# Altium PCB Light_PCB.PcbDoc
Units mil, origin at the board's own origin, x right, y up, seen from the top; angles counter-clockwise.
Board outline 2090 x 1720 mil, 2 copper layers (Top Layer, Bottom Layer); 9 components, 6 nets, 62 pads, 0 vias.
Unrouted connection lines stored in the file: 6.
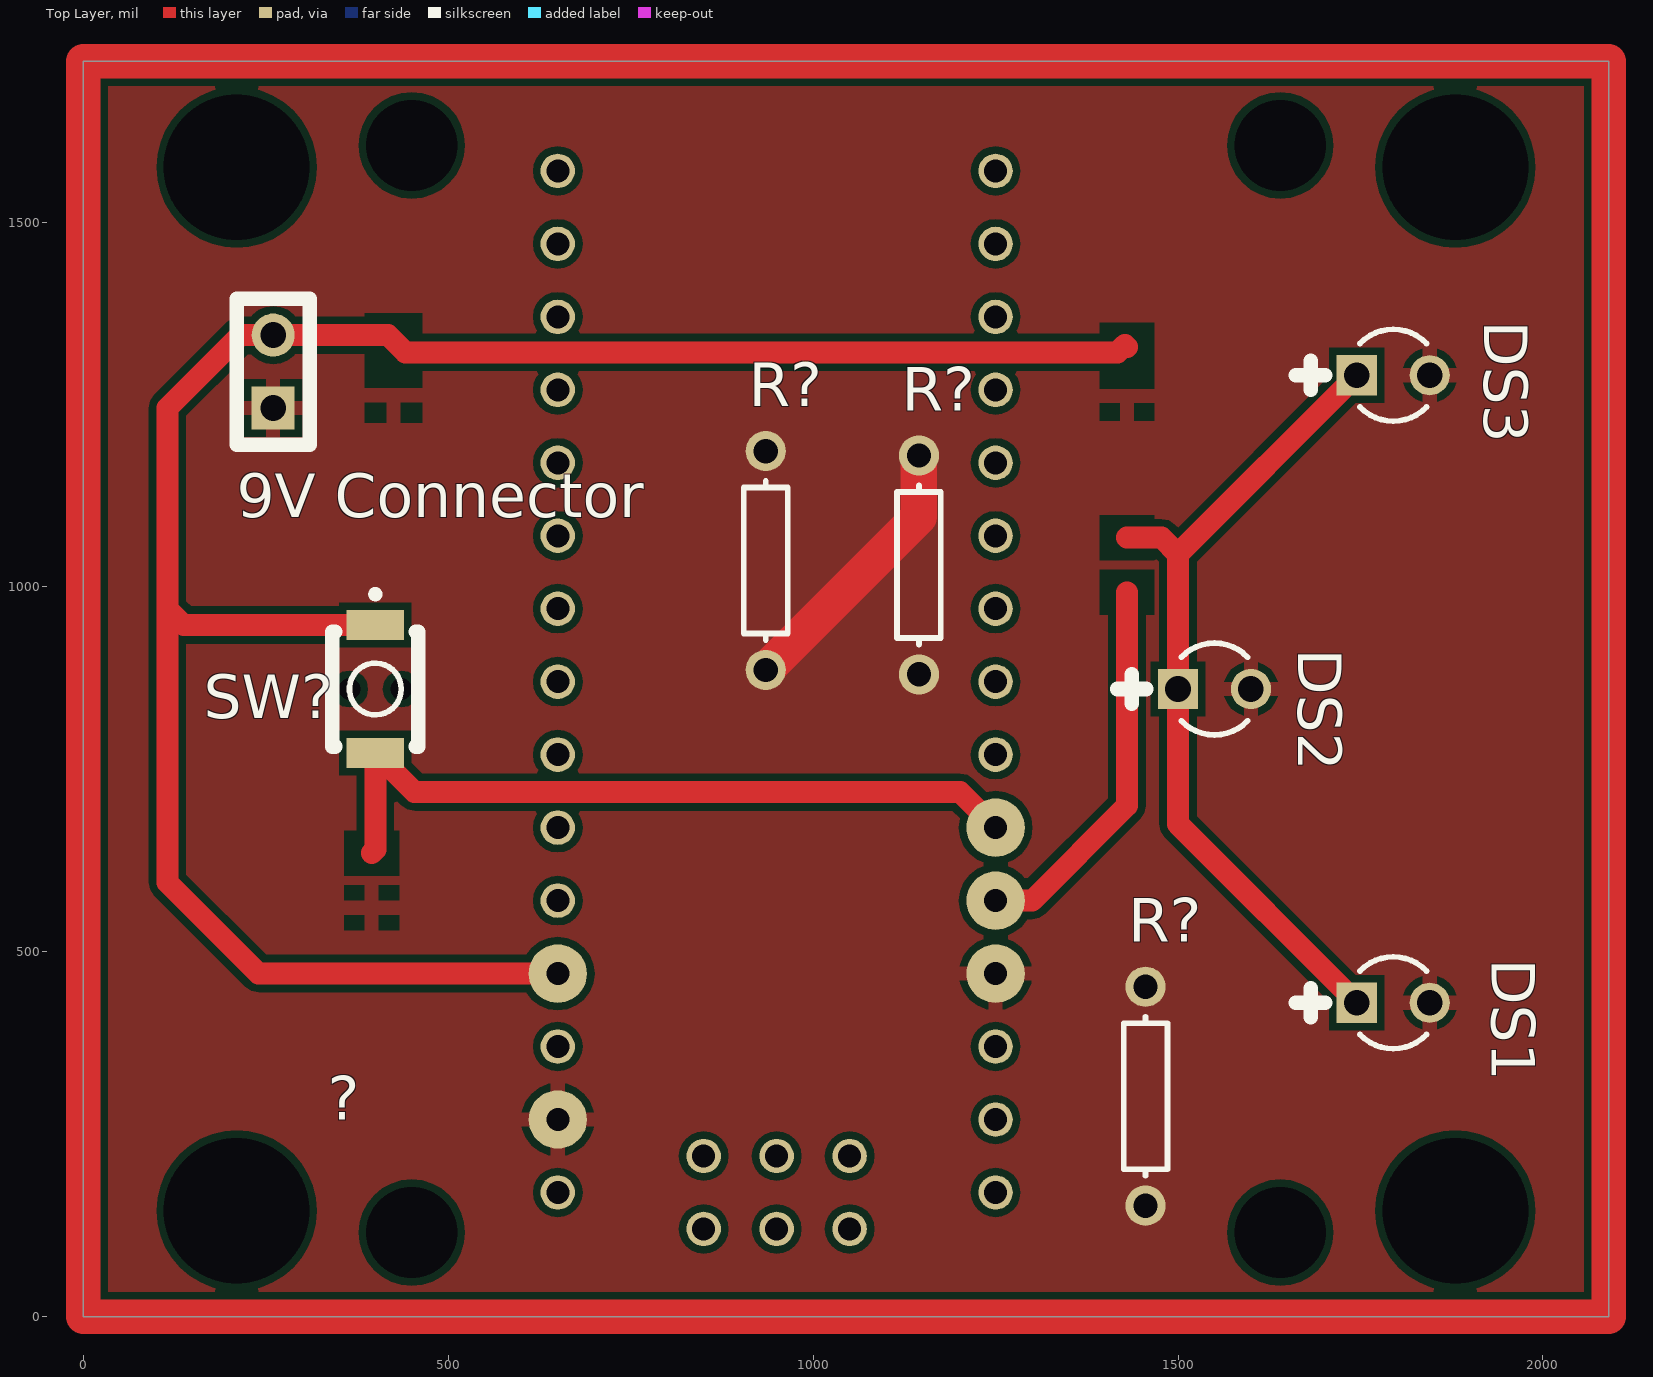
[diagram p0: Top Layer view]
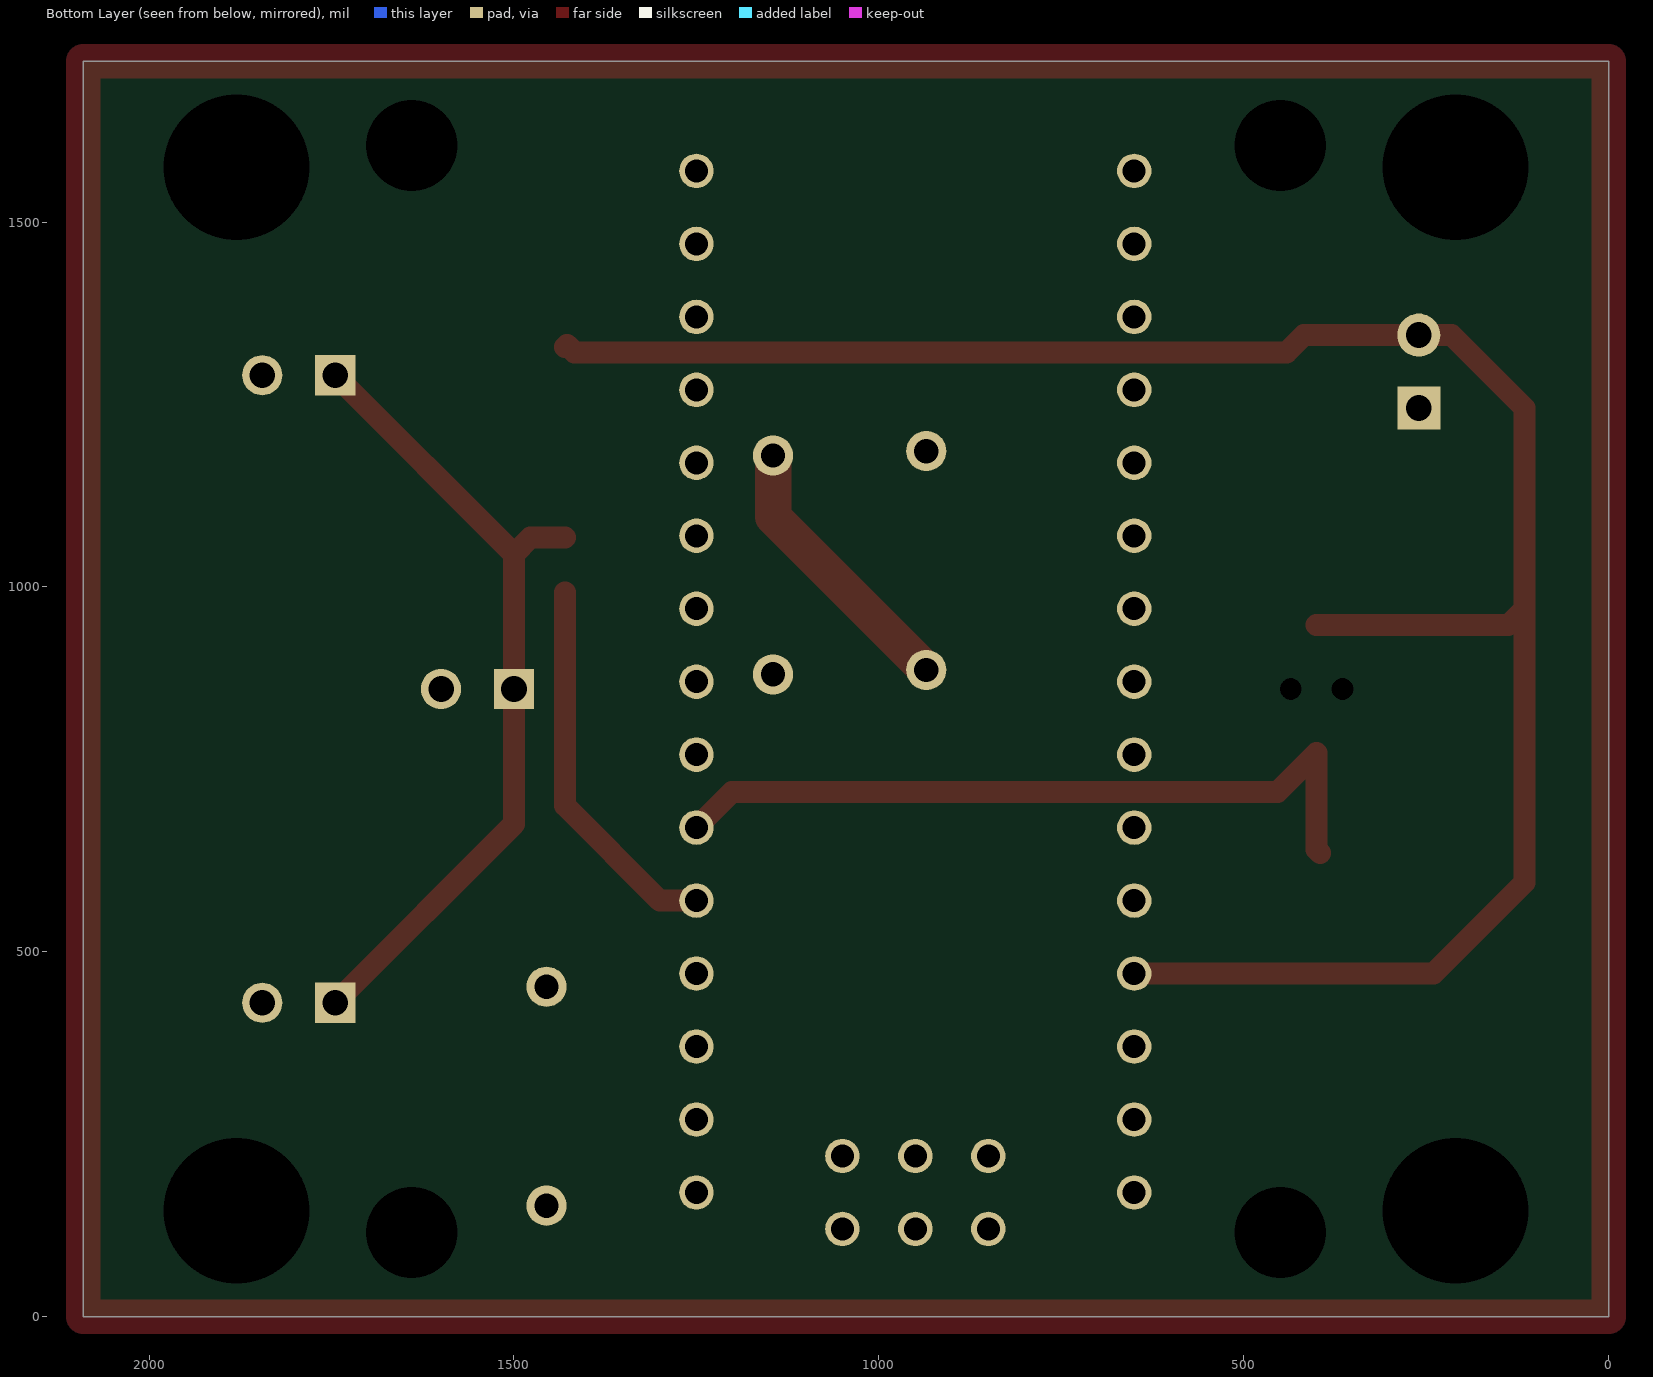
[diagram p1: Bottom Layer view, seen from below]

## Layer stack, top to bottom
Top Solder: solder mask 0.4, Solder Resist, Dk 3.5
Top Layer: signal copper 1.4
Dielectric 1: dielectric 12.6, FR-4, Dk 4.8
Bottom Layer: signal copper 1.6
Bottom Solder: solder mask 0.4, Solder Resist, Dk 3.5

## Board outline
0,1720 2090,1720 2090,0 0,0

## Design rules (kind name [scope] priority, off if disabled: settings)
Clearance [All] p1: gap=10 ignorepadtopadclearanceinfootprint=FALSE except(0: Arc-Hole Track-Hole SMDPad-Hole THPad-Hole Via-Hole Fill-Hole Poly-Hole Region-Hole Text-Hole)
PolygonConnect [All] p1: connectstyle=Relief reliefconductorwidth=20 reliefentries=4 polygonreliefangle="90 Angle" airgapwidth=10
RoomDefinition Schematic [InComponentClass('Schematic')] p1: confinementstyle=ConfineIn formatcopy=TRUE lockcomponents=FALSE outline -805,-1.1 2090,-1.1 2090,1718.9 -805,1718.9
RoutingVias [All] p1: holewidth=28 width=50 viastyle="Through Hole" minholewidth=28 minwidth=50 maxholewidth=28 maxwidth=50
SolderMaskExpansion [All] p1: expansion=4
Width [All] p1: maxlimit=50 minlimit=10 preferedwidth=50 toplayer_minwidth=20 bottomlayer_maxwidth=10 bottomlayer_prefwidth=10 minimp=50.000000 maximp=50.000000 favimp=50.000000
30 further rules are at their usual default settings.

## Components (designator, comment, footprint, x,y, rotation, side; value= is the part's Value field where it differs from the comment)
"9V Connector" "Header 2" HDR1X2 260,1245 r90 top
? "Arduino Nano" NANO 1050,520 r0 top
DS1 "WP710A10QBC/D" KING-WP710A10QBCD_V 1795,430 r0 top
DS2 "WP710A10QBC/D" KING-WP710A10QBCD_V 1550,860 r0 top
DS3 "WP710A10QBC/D" KING-WP710A10QBCD_V 1795,1290 r0 top
R? "Res1" AXIAL-0.3 1145,1030 r90 top value=15K
R? "Res1" AXIAL-0.3 1455.49,301.98 r90 top value=200
R? "Res1" AXIAL-0.3 935,1036.08 r90 top value=15K
SW? "TVAF06" JNFU-TVAF06_V 400,860 r270 top

## Footprints (in the part's own frame and the unit in brackets; to place one, negate y for a bottom-side part, rotate by r counter-clockwise, add the part's x,y. Pads: shape width x height; smd on the part's side, far side on the other; paste and mask are expansions set on the pad)
AXIAL-0.3 [mm] "Axial Device, Thru-Hole; 2 Leads; 0.3 in Pin Spacing"
  round 1.4 hole 0.85: 1(-3.81,0) 2(3.81,0)
  silkscreen extent -2.77,-0.76 2.77,0.76
HDR1X2 [mm] "Connector; Header; 2 Position"
  rect 1.5x1.5 hole 0.9: 1(0,0)
  round 1.5 hole 0.9: 2(2.54,0)
  silkscreen extent -1.27,-1.27 3.81,1.27
JNFU-TVAF06_V [mm] "Switch, Push Button, SMD, 2-Leads, Body 3x4mm"
  rect 1.05x2 smd: 1(-2.225,0) 2(2.225,0)
  round 0.4 hole 0.75 unplated: MH1(0,0.9) MH2(0,-0.9)
  silkscreen extent -3.42,-1.5 2,1.5, body extent -2,-1.5 2,1.5, height 2
KING-WP710A10QBCD_V [mm] "THD, 2-Leads, Dia 3.2mm"
  rect 1.4x1.4 hole 0.889 paste-0.025 mask+0.064: 1(-1.27,0)
  round 1.4 hole 0.889 paste-0.025 mask+0.064: 2(1.27,0)
  silkscreen extent -3.39,-1.6 1.16,1.6
NANO [mil]
  round 47.25 / inner round 60 / far side round 47.25 hole 31.5: 3.3V(-400,950) A0(-400,750) A1(-400,650) A2(-400,550) A3(-400,450) A4(-400,350) A5(-400,250) A6(-400,150) A7(-400,50) AREF(-400,850) D4(200,250) D5(200,350) D6(200,450) D7(200,550) D8(200,650) D9(200,750) D10(200,850) D11(200,950) D12(200,1050) D13(-400,1050) ICSP1(-200,-400) ICSP2(-200,-300) ICSP3(-100,-400) ICSP4(-100,-300) ICSP5(0,-400) ICSP6(0,-300) RAW(-400,-350) RST(-400,-150) RST1(200,-150) RX1(200,-250) TX0(200,-350)
  round 80 / inner round 60 / far side round 47.25 hole 31.5: 5V(-400,-50) D2(200,50) D3(200,150) GND(-400,-250) GND1(200,-50)

## Part data
"9V Connector": "Header, 2-Pin", LatestRevisionDate=17-Jul-2002, LatestRevisionNote="Re-released for DXP Platform.", Publisher="Altium Limited"
?: library part NANO, DeviceSetName=NANO, GateName_1=G$1, LibraryName=Arduino-clone, Package=NANO, SymbolName_1=NANO
DS1 DS2 DS3: library part CMP-2000-07416-1, "Blue LED, 3.3 V, 20 mA, -40 to 85 degC, 2-Pin THD, RoHS, Bulk", Forward Current=20mA, Forward Voltage=3.3V, Illumination Color=Blue, Lens Color/Style=WaterClear, Manufacturer=Kingbright, Maximum Operating Temperature=+85C, Minimum Operating Temperature=-40C, Package Description="2-Pin Through Hole Device, Dia 3.2 mm", Package Reference=WP710A10QBCD, Wavelength/Color Temperature=470nm, Datasheet URL=https://datasheet.ciiva.com/2121/wp710a10qbc-d-2121617.pdf, Datasheet Version="Rev. 5B, 09/2014", Factory Pack Quantity=500, LED Size=T-1, Lens Dimensions=3mmx4.6mm, Lens Shape=Dome, Luminous Intensity=1600mcd, Manufacturer URL=http://www.kingbright.com/, Mounting Style=ThroughHole, Mounting Technology=ThroughHole, Packaging=Bulk, Product Category=StandardLEDs-ThroughHole, RoHS=Details, Type=SolidStateLEDLamp, Viewing Angle=20deg
R? R? R?: "Resistor", LatestRevisionDate=17-Jul-2002, LatestRevisionNote="Re-released for DXP Platform.", PackageDescription="Axial Device, Thru-Hole; 2 Leads; 0.3 in Pin Spacing", PackageReference=AXIAL-0.3, Published=8-Jun-2000, Publisher="Altium Limited"
SW?: library part CMP-0587-00001-2, "Switch, SPST Push Button, 50 mA, 12 V DC, SMD, -30 to 85 degC, RoHS", Contact Resistance="100 mW max", Dielectric Strength="250 V AC for 1 min", Insulation Resistance="100 MW min. 100 V DC", Manufacturer=Jianfu, Operating Temperature="-30 to 85 degC", Rating="50 mA. 12 V DC", ComponentLink1Description="Manufacturer URL", ComponentLink1URL=http://www.jian-fu.com/, ComponentLink2Description=Datasheet, ComponentLink2URL=http://en.jian-fu.com/product-22.html, Lifetime="100000 Cycles min", Mounting Technology="Surface Mount", PackageDescription="2-Pin Switch, Push Button, SMD, Body 2.9 x 3.9 mm", PackageReference=TVAF06, PartNumber=TVAF06, RoHS=TRUE, Travel="0.13 +/- 0.05 mm"

## Free pads (board coordinates)
  round 60 hole 200: 3(210,145) 3(210,1575) 3(1880,145) 3(1880,1575)
  round 60 hole 125: 3(450,115) 3(450,1605) 3(1640,115) 3(1640,1605)

## Nets (pads, with @x,y where several pads share a name; then routed paths per layer and width w, separated by ;. In a path a pad name is that pad's centre, name@x,y a point inside that pad or via, vN(x,y) a via of type N, cw(c..) or ccw(c..) an arc to the next point about the centre after c; other vN are vias at no path point)
GND: "9V Connector.1" ?.GND ?.GND1 DS1.2 DS2.2 DS3.2 R?.1@1145,880
"Net9V Connector_2": "9V Connector.2" ?.RAW SW?.1
Net?_D2: ?.D2 R?.1@1455.49,151.98 | length 526.4
  Top Layer w30: ?.D2 1300,570 1430,700 1430,992.6
Net?_D7: ?.D7 R?.2@935,1186.08
NetDS1_1: DS1.1 DS2.1 DS3.1 R?.2@1455.49,451.98 | length 1142.2
  Top Layer w30: 1430,1067.4 1477.6,1067.4 1500,1045 ; DS1.1 1500,675 DS2.1 1500,1045 ; DS3.1 1500,1045
NetR?_1: R?.1@935,886.08 R?.2@1145,1180 SW?.2 | length 380.9
  Top Layer w50: R?.1@935,886.08 1145,1096.08 R?.2@1145,1180
pads on no net: ?.3.3V ?.5V ?.A0 ?.A1 ?.A2 ?.A3 ?.A4 ?.A5 ?.A6 ?.A7 ?.AREF ?.D3 ?.D4 ?.D5 ?.D6 ?.D8 ?.D9 ?.D10 ?.D11 ?.D12 ?.D13 ?.ICSP1 ?.ICSP2 ?.ICSP3 ?.ICSP4 ?.ICSP5 ?.ICSP6 ?.RST ?.RST1 ?.RX1 ?.TX0 SW?.MH1 SW?.MH2
copper on no net: | length 11554.5
  Top Layer w30: 395,635 400,640 400,772.4 453.78,718.62 1201.38,718.62 1250,670 ; 400,947.6 137.4,947.6 115,970 ; 650,470 240,470 115,595 115,970 ; 1430,1328.46 1427.09,1331.38 1417.09,1321.38 441.03,1321.38 425,1337.4 417.4,1345 260,1345 215,1345 115,1245 115,970
  Top Layer w47.24: 0,0 0,1720 2090,1720 2090,0 0,0

## Polygon pours and split planes (outlines as drawn)
GND on Top Layer "Top Layer-GND" (solid, pour order 12): 10,15 0,25 0,1710 2085,1710 2090,1715 2090,-1.1
no net on Top Layer "Top Layer-No Net 1" (solid, pour order 10): -770,979.53
no net on Top Layer "Top Layer-No Net 2" (solid, pour order 2): -210,185